# Altium PCB CC2530传感器.PcbDoc
Units mm, origin at the board's own origin, x right, y up, seen from the top; angles counter-clockwise.
Board outline 52.32 x 97.41 mm, 4 copper layers (Top Layer, Internal Plane 1, Internal Plane 2, Bottom Layer); 49 components, 46 nets, 169 pads, 35 vias.
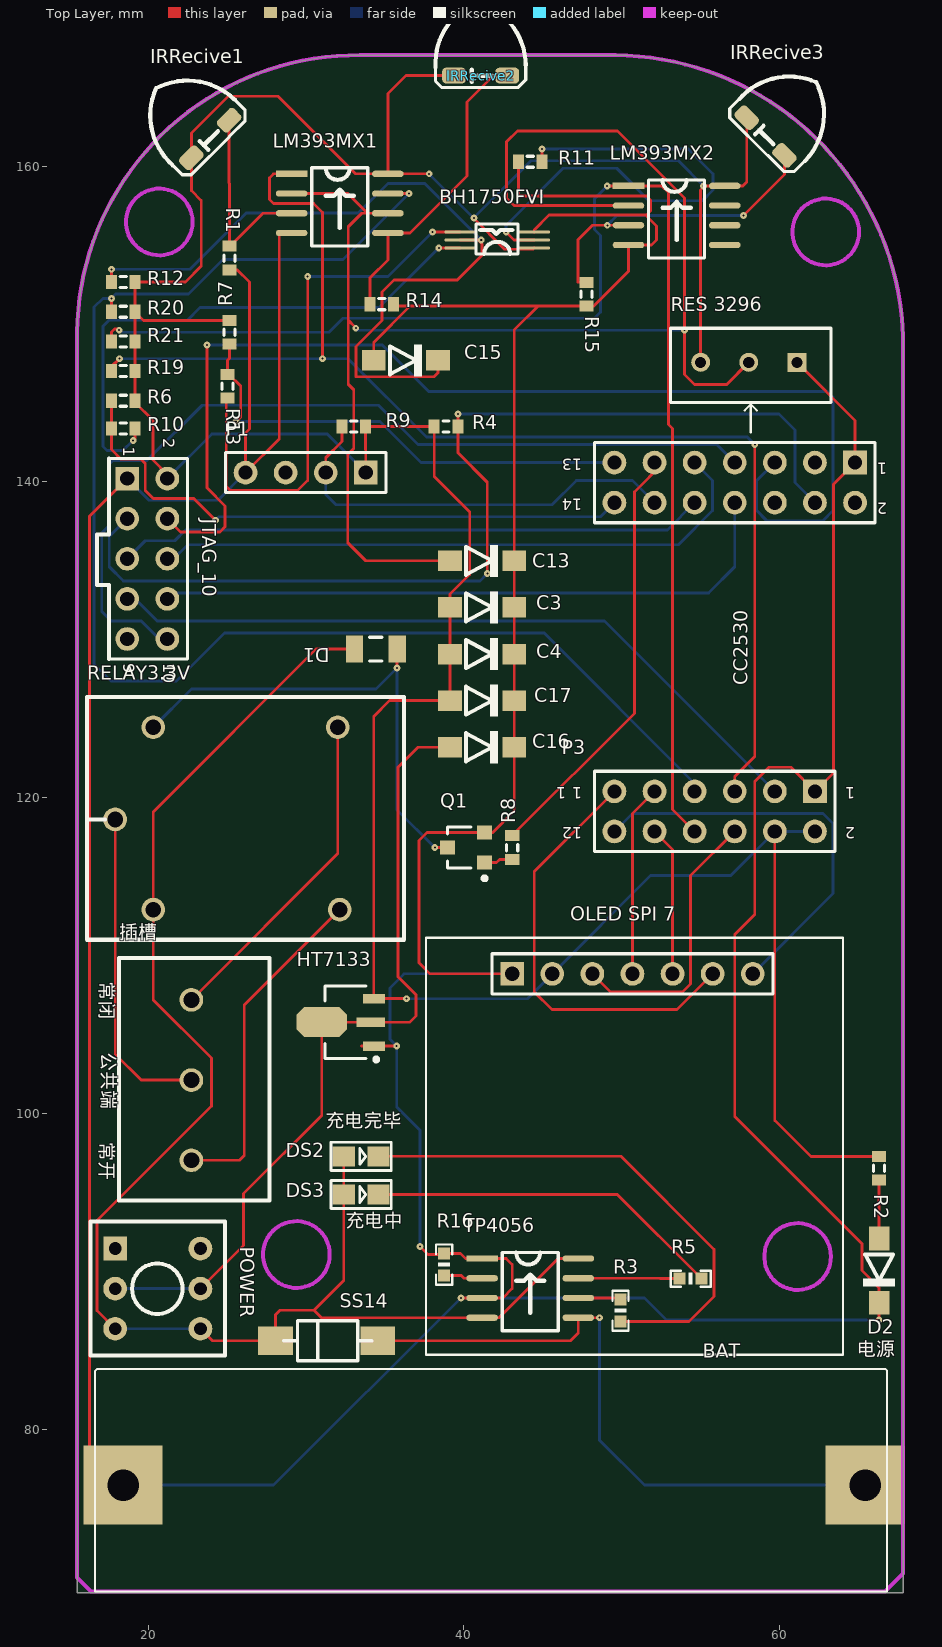
[diagram p0: Top Layer view]
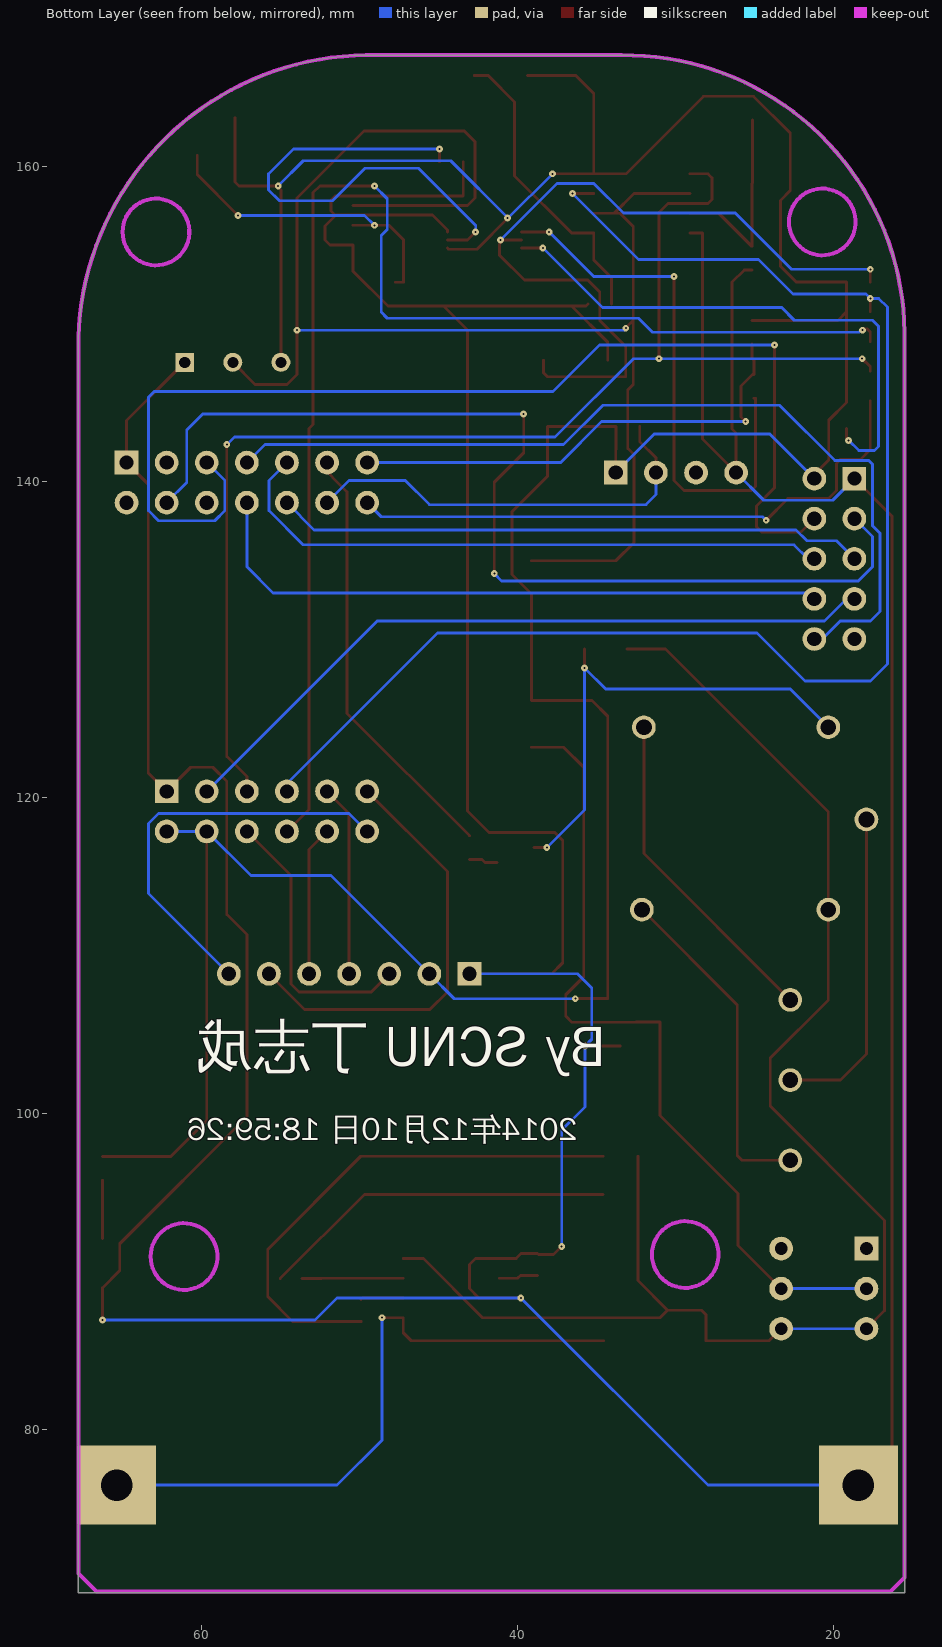
[diagram p1: Bottom Layer view, seen from below]
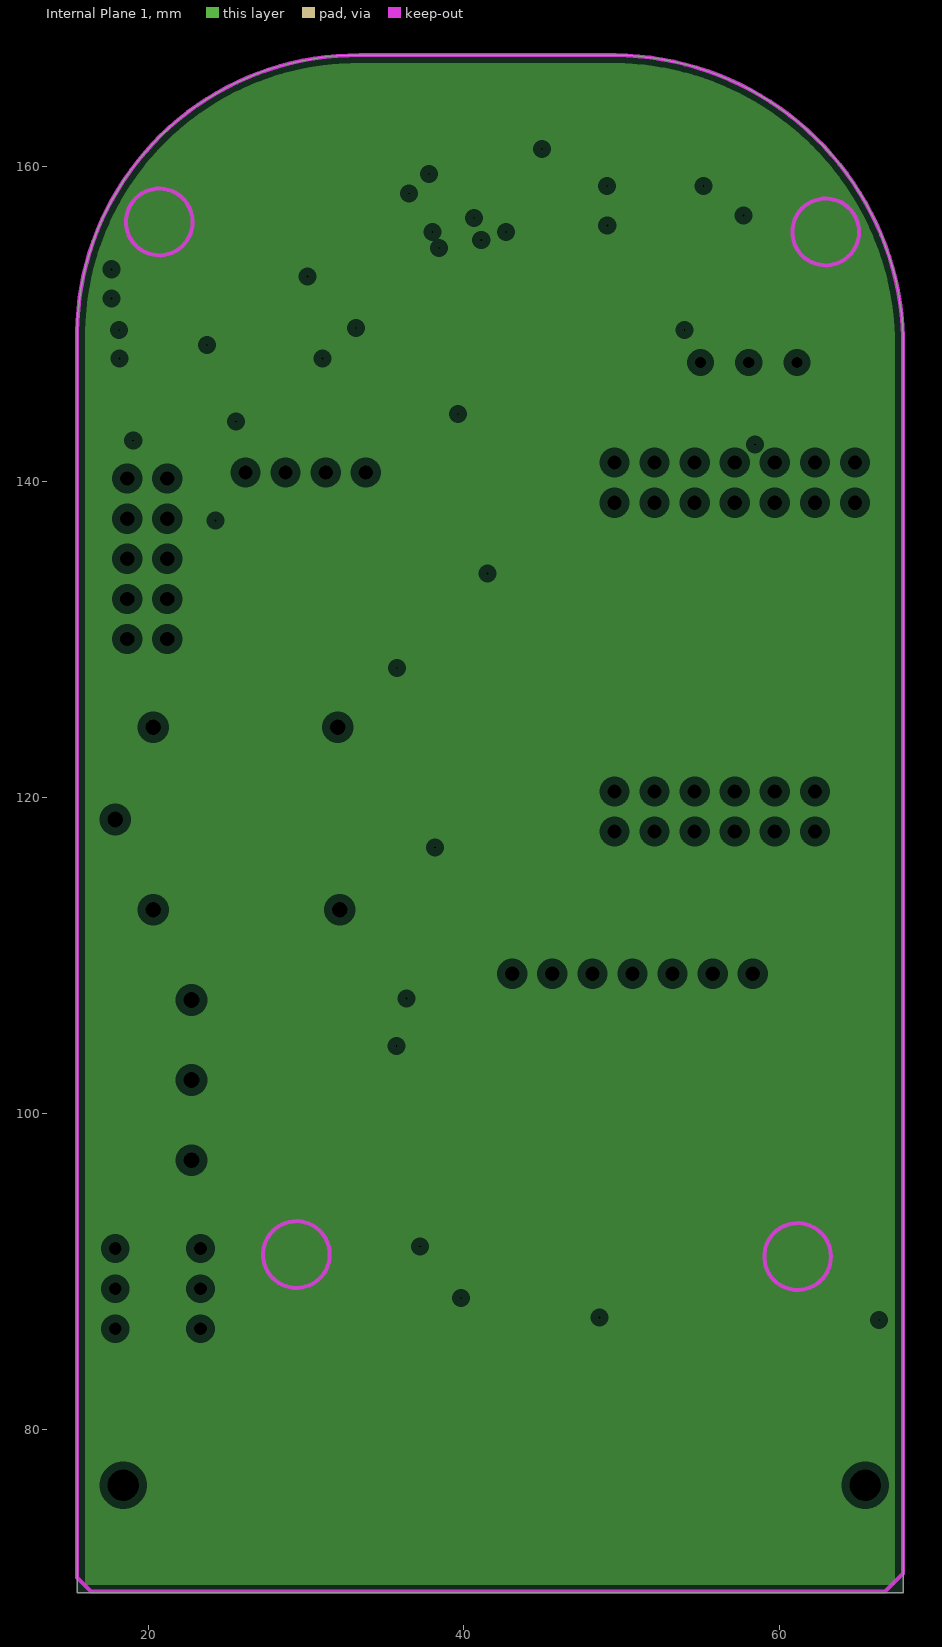
[diagram p2: Internal Plane 1, clearances drawn from the general rule]
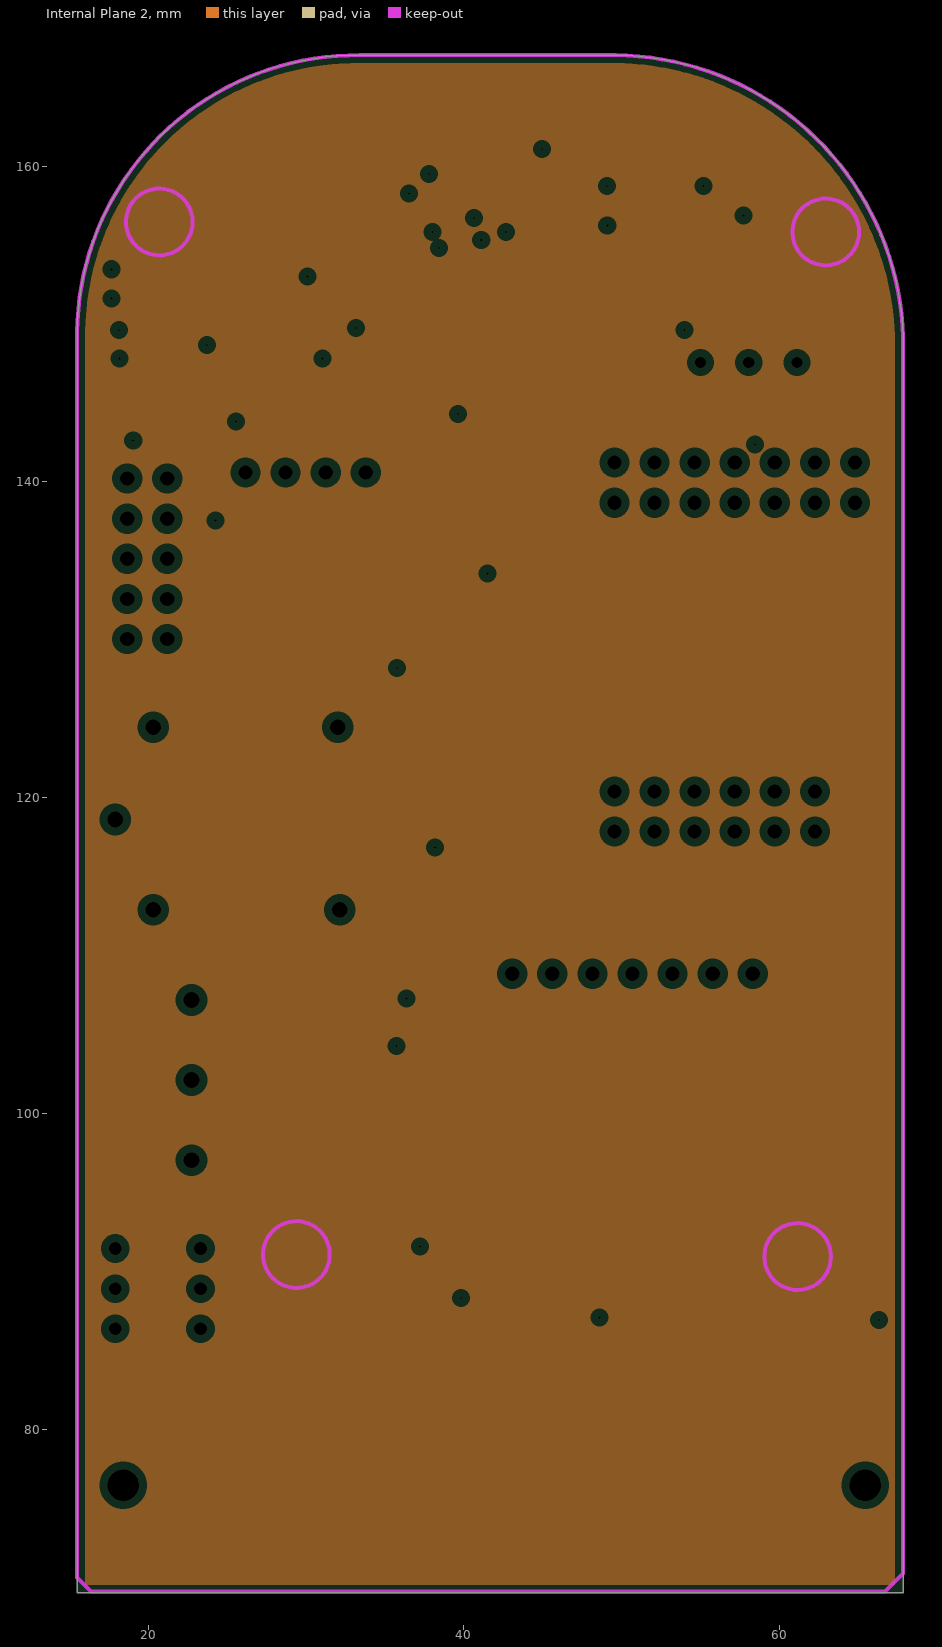
[diagram p3: Internal Plane 2, clearances drawn from the general rule]

## Layer stack, top to bottom
Top Layer: signal copper 0.0356
Dielectric: dielectric 0.32, FR-4, Dk 4.8
Internal Plane 1: plane copper 0.0356
Dielectric: dielectric 0.32, FR-4, Dk 4.8
Internal Plane 2: plane copper 0.0356
Dielectric: dielectric 0.32, FR-4, Dk 4.8
Bottom Layer: signal copper 0.0356

## Board outline
15.494,69.626 15.494,149.479 cw(c33.232,149.288) 33.422,167.026 48.853,167.026 cw(c49.401,148.609) 67.818,149.157 67.818,69.626

## Design rules (kind name [scope] priority, off if disabled: settings)
Clearance [All] p1: gap=0.3
PlaneClearance [All] p1: clearance=0.508
PlaneConnect [All] p1: planeconnectstyle=Relief reliefexpansion=0.508 reliefentries=4 reliefconductorwidth=0.254 reliefairgap=0.254
PolygonConnect [All] p1: connectstyle=Relief reliefconductorwidth=0.254 reliefentries=4 polygonreliefangle="90 Angle" airgapwidth=0.254
RoomDefinition CC2530传感器功能底板 [InComponentClass('CC2530传感器功能底板')] p1: confinementstyle=ConfineIn formatcopy=TRUE lockcomponents=FALSE outline 0,0 50.8,0 50.8,25.4 0,25.4
RoutingVias [All] p1: holewidth=0.127 width=0.432 viastyle="Through Hole" minholewidth=0.127 minwidth=0.432 maxholewidth=0.127 maxwidth=0.432
SolderMaskExpansion [All] p1: expansion=0.102
Width [All] p1: maxlimit=0.178 minlimit=0.178 preferedwidth=0.178
26 further rules are at their usual default settings.

## Components (designator, comment, footprint, x,y, rotation, side; value= is the part's Value field where it differs from the comment)
BAT "BAT" BAT 65.405,76.454 r180 top
BH1750FVI "BH1750FVI" BH1750FVI 44.704,154.813 r180 top
C3 "Cap" DIODE_SOP 41.148,132.048 r0 top
C4 "Cap Semi" DIODE_SOP 41.148,129.095 r0 top
C13 "Cap Semi" DIODE_SOP 41.148,135.001 r0 top
C15 "Cap Semi" DIODE_SOP 36.322,147.701 r0 top
C16 "Cap Pol1" DIODE_SOP 41.148,123.19 r0 top
C17 "Cap Pol1" DIODE_SOP 41.148,126.143 r0 top
CC2530 "Header 7X2" HDR2X7 64.77,141.224 r180 top (schematic designator P2)
D1 "1N4148" C1206 34.417,129.413 r180 top
D2 "LED" DIODE_SOP 66.294,90.043 r270 top
DS2 "LED1GREEN" SMDLED 32.385,97.282 r0 top
DS3 "LED1RED" SMDLED 32.385,94.869 r0 top
HT7133 "HT7133" HT7133 34.29,104.267 r180 top
IRRecive1 "IRRecive" IRRecive 22.733,160.528 r45 top
IRRecive2 "IRRecive" IRRecive 39.37,165.735 r0 top
IRRecive3 "IRRecive" IRRecive 57.912,163.068 r315 top
JTAG_10 "JTAG_10" JTAG_10 18.669,140.208 r270 top
LM393MX1 "LM393MX" LM393MX 29.083,159.512 r0 top
LM393MX2 "LM393MX" LM393MX 50.419,158.75 r0 top
"OLED SPI 7" "OLED SPI 7" "OLED SPI 7" 43.053,108.839 r0 top
P1 "Header 4" HDR1X4 33.782,140.589 r180 top
P3 "Header 6X2" HDR2X6 62.23,120.396 r180 top
POWER "BUTTON" BTN8.5*8.5 17.907,91.44 r0 top (schematic designator K?)
Q1 "8050" SOT-23R 40.259,116.84 r90 top
R1 "Res3" J1-0603 25.146,154.178 r90 top
R2 "330R" J1-0603 66.294,96.52 r90 top
R3 "1K" 0603P 49.911,87.503 r90 top
R4 "10K" J1-0603 38.862,143.51 r180 top
R5 "1K" 0603P 54.356,89.535 r180 top
R6 "Res3" J1-0603 18.415,145.136 r0 top
R7 "Res3" J1-0603 25.146,149.479 r90 top
R8 "1K" J1-0603 43.053,116.84 r270 top
R9 "Res Semi" J1-0603 33.02,143.51 r0 top
R10 "Res3" J1-0603 18.415,143.383 r180 top
R11 "Res3" J1-0603 44.196,160.274 r0 top
R12 "Res3" J1-0603 18.415,152.654 r0 top
R13 "Res3" J1-0603 25.019,146.05 r90 top
R14 "Res3" J1-0603 34.798,151.257 r180 top
R15 "Res3" J1-0603 47.752,151.892 r90 top
R16 "4K" 0603P 38.735,90.424 r90 top
R19 "Res3" J1-0603 18.415,147.015 r0 top
R20 "Res3" J1-0603 18.415,150.774 r0 top
R21 "Res3" J1-0603 18.415,148.895 r0 top
RELAY3.3V "RELAY3.3V" RELAY3.3V 17.907,118.618 r0 top
"RES 3296" "RES 3296" "RES 3296" 61.087,147.574 r180 top
SS14 "SS14" IN4007 34.544,85.598 r180 top
TP4056 "TP4056" TP4056 41.148,90.805 r0 top
插槽 "插槽" 杜邦线插槽 22.733,107.188 r0 top

## Footprints (in the part's own frame and the unit in brackets; to place one, negate y for a bottom-side part, rotate by r counter-clockwise, add the part's x,y. Pads: shape width x height; smd on the part's side, far side on the other; paste and mask are expansions set on the pad)
0603P [mil]
  rect 30x30 smd: 1(-27,0) 2(27.5,-0.06)
  silkscreen extent -50,-20 50,20
BAT [mm]
  rect 5x5 hole 2: 1(0,0) 2(46.99,0)
  silkscreen extent -1.4,-7.37 48.77,6.73
BH1750FVI [mm]
  oval 2x0.2 smd: 1(0.254,0) 2(0.254,-0.508) 3(0.254,-1.016) 4(4.953,-1.016) 5(4.953,-0.508) 6(4.953,0)
  silkscreen extent 1.27,-1.52 3.94,0.38
BTN8.5*8.5 [mm]
  rect 1.5x1.5 hole 0.8: 1(0,0)
  round 1.5 hole 0.8: 2(0,-2.54) 3(0,-5.08) 4(5.4,-5.08) 5(5.4,-2.54) 6(5.4,0)
  silkscreen extent -1.55,-6.79 6.95,1.71
C1206 [mm] "Chip Capacitor, Body 3.2x1.6mm, IPC High Density"
  rect 1.1x1.7 smd: 1(-1.35,0) 2(1.35,0)
  silkscreen extent -0.4,-0.75 0.4,0.75, body extent -1.7,-0.9 1.7,0.9, height 1.3
DIODE_SOP [mm]
  rect 1.5x1.3 smd: 1(-2.032,0) 2(2.032,0)
  silkscreen extent -1.02,-1.02 1.02,1.02
HDR1X4 [mm] "Connector; Header; 4 Position"
  rect 1.5x1.5 hole 0.9: 1(0,0)
  round 1.5 hole 0.9: 2(2.54,0) 3(5.08,0) 4(7.62,0)
  silkscreen extent -1.27,-1.27 8.89,1.27
HDR2X6 [mm] "Connector; Header; 6x2 Position"
  rect 1.5x1.5 hole 0.9: 1(0,0)
  round 1.5 hole 0.9: 2(0,2.54) 3(2.54,0) 4(2.54,2.54) 5(5.08,0) 6(5.08,2.54) 7(7.62,0) 8(7.62,2.54) 9(10.16,0) 10(10.16,2.54) 11(12.7,0) 12(12.7,2.54)
  silkscreen extent -1.27,-1.27 13.97,3.81
HDR2X7 [mm] "Connector; Header; 7x2 Position"
  rect 1.5x1.5 hole 0.9: 1(0,0)
  round 1.5 hole 0.9: 2(0,2.54) 3(2.54,0) 4(2.54,2.54) 5(5.08,0) 6(5.08,2.54) 7(7.62,0) 8(7.62,2.54) 9(10.16,0) 10(10.16,2.54) 11(12.7,0) 12(12.7,2.54) 13(15.24,0) 14(15.24,2.54)
  silkscreen extent -1.27,-1.27 16.51,3.81
HT7133 [mm]
  rect 1.4x0.6 smd: 1(0,0) 3(0,-3)
  rect 1.8x0.6 smd: 2(0.2,-1.5)
  oct 3.2x1.9 smd: 2(3.302,-1.524)
  silkscreen extent -0.28,-3.8 3.1,0.97, body extent 0.5,-3.8 3.1,0.8, height 1.6
IN4007 [mm]
  rect 2.2x1.8 smd: 1(0,0) 2(6.477,0)
  silkscreen extent 0.38,-1.27 5.97,1.27
IRRecive [mm]
  rrect50% 1.5x1 smd: 1(0,0) 2(3.373,0)
  silkscreen extent -1.18,-0.76 4.54,4.7
J1-0603 [mm] "Chip Resistor, Body 1.6x0.8mm, IPC High Density"
  rect 0.7x0.9 smd: 1(-0.75,0) 2(0.75,0)
  silkscreen extent -0.2,-0.35 0.2,0.35, body extent -0.85,-0.48 0.85,0.48, height 0.9
JTAG_10 [mm]
  rect 1.5x1.5 hole 0.9: 1(0,0)
  round 1.5 hole 0.9: 2(0,2.54) 3(2.54,0) 4(2.54,2.54) 5(5.08,0) 6(5.08,2.54) 7(7.62,0) 8(7.62,2.54) 9(10.16,0) 10(10.16,2.54)
  silkscreen extent -1.27,-1.9 11.43,3.81
LM393MX [mm]
  rect 2x0.4 smd: 1(0,0)
  oval 2x0.4 smd: 2(0,-1.249) 3(0,-2.498) 4(0,-3.746) 5(6.096,-3.746) 6(6.096,-2.498) 7(6.096,-1.249) 8(6.096,0)
  silkscreen extent 1.27,-4.57 4.83,0.38
"OLED SPI 7" [mm]
  rect 1.5x1.5 hole 0.9: 1(0,0)
  round 1.5 hole 0.9: 2(2.54,0) 3(5.08,0) 4(7.62,0) 5(10.16,0) 6(12.7,0) 7(15.24,0)
  silkscreen extent -5.46,-24.13 20.95,2.29
RELAY3.3V [mm]
  round 1.5 hole 1: 1(0,0) 2(14.097,5.842) 3(14.224,-5.715) 4(2.413,5.842) 5(2.413,-5.715)
  silkscreen extent -1.78,-7.62 18.29,7.75
"RES 3296" [mm]
  rect 1.2x1.2 hole 0.7: 1(0,0)
  round 1.2 hole 0.7: 2(3.048,0) 3(6.096,0)
  silkscreen extent -2.16,-2.16 8,4.44
SMDLED [mm]
  rect 1.4x1.27 smd: 1(0.001,-0.002) 2(2.211,-0.002)
  silkscreen extent -0.8,-0.89 3.01,0.89
SOT-23R [mm]
  rect 0.9x0.95 smd: 1(0.95,-1.048) 2(-0.95,-1.048) 3(0,1.302)
  silkscreen extent -2.07,-1.17 1.3,1.3
TP4056 [mm]
  rect 2x0.4 smd: 1(0,0)
  oval 2x0.4 smd: 2(0,-1.249) 3(0,-2.498) 4(0,-3.746) 5(6.096,-3.746) 6(6.096,-2.498) 7(6.096,-1.249) 8(6.096,0)
  silkscreen extent 1.27,-4.57 4.83,0.38
杜邦线插槽 [mm]
  round 1.5 hole 1: 1(0,0) 2(0,-5.08) 3(0,-10.16)
  silkscreen extent -4.57,-12.7 4.95,2.67

## Part data
C3: "Capacitor"
C4 C13 C15: "Capacitor (Semiconductor SIM Model)"
C16 C17: "Polarized Capacitor (Radial)"
CC2530: "Header, 7-Pin, Dual row"
D1: library part D
DS2 DS3: library part LED2, "Typical RED, GREEN, YELLOW, AMBER GaAs LED"
P1: "Header, 4-Pin"
P3: "Header, 6-Pin, Dual row"
Q1: library part NPN, "8050/BCW846/BCW847"
R1 R6 R7 R10 R11 R12 R13 R14 R15 R19 R20 R21: "Resistor"
R2: library part RES2
R3 R5 R8 R16: library part R
R4: library part res0402
R9: "Semiconductor Resistor"
SS14: library part IN4007

## Via types
v1: diameter 0.432, hole 0.127, Top Layer to Bottom Layer, 35 vias

## Nets (pads, with @x,y where several pads share a name; then routed paths per layer and width w, separated by ;. In a path a pad name is that pad's centre, name@x,y a point inside that pad or via, vN(x,y) a via of type N, cw(c..) or ccw(c..) an arc to the next point about the centre after c; other vN are vias at no path point)
AOUT1: IRRecive1.2 LM393MX1.3 R1.2 | length 12.8
  Top Layer w0.178: IRRecive1.2 25.118,158.93 25.146,158.902 R1.2 25.173,154.928 27.259,157.014 LM393MX1.3
AOUT2: IRRecive2.2 LM393MX1.5 R14.2 | length 19.4
  Top Layer w0.178: R14.2 34.048,152.933 35.179,154.064 LM393MX1.5 36.576,155.766 40.195,159.385 40.195,164.071 41.859,165.735 IRRecive2.2
AOUT3: IRRecive3.2 LM393MX2.3 R15.2 | length 20.6
  Top Layer w0.178: R15.2 47.231,152.642 47.231,155.333 48.15,156.252 v1(49.076,156.252) LM393MX2.3 ; v1(57.704,156.87) 60.297,159.464 IRRecive3.2
  Bottom Layer w0.178: v1(49.076,156.252) 49.694,156.87 v1(57.704,156.87)
BAT: BAT.1 SS14.1 TP4056.5 | length 41
  Top Layer w0.178: SS14.1 46.736,85.598 47.244,86.106 TP4056.5 v1(48.59,87.058)
  Bottom Layer w0.178: v1(48.59,87.058) 48.59,79.299 51.435,76.454 BAT.1
CSN: CC2530.10 JTAG_10.5 | length 37.4
  Bottom Layer w0.178: JTAG_10.5 19.812,136.271 21.676,136.271 22.366,136.961 52.887,136.961 CC2530.10
DC: CC2530.4 JTAG_10.3 R4.1 | length 65.8
  Top Layer w0.178: v1(39.624,144.297) 39.612,144.285 R4.1 39.612,141.846 41.478,139.979 v1(41.478,134.188)
  Bottom Layer w0.178: JTAG_10.3 17.53,136.529 17.53,134.62 18.423,133.727 41.017,133.727 v1(41.478,134.188) ; v1(39.624,144.297) 59.944,144.297 60.96,143.281 60.96,139.954 CC2530.4
DD: CC2530.5 JTAG_10.4 | length 73.2
  Top Layer w0.178: JTAG_10.4 22.047,136.83 24.536,136.83 24.867,137.16 24.867,138.481 23.724,139.624 v1(23.724,148.666)
  Bottom Layer w0.178: v1(23.724,148.666) 34.823,148.666 37.77,145.72 63.017,145.72 63.373,145.364 63.373,138.176 62.738,137.541 59.182,137.541 58.547,138.176 58.547,140.081 CC2530.5
GND: "OLED SPI 7.1" "RES 3296.1" BAT.2 BH1750FVI.3 C3.2 C4.2 C13.2 C15.1 C16.2 C17.2 CC2530.1 D2.2 HT7133.1 JTAG_10.1 LM393MX1.4 LM393MX2.4 P1.4 P3.1 Q1.1 R1.1 R11.1 R14.1 R15.1 R16.2 TP4056.1 TP4056.3 | length 368.6
  Top Layer w0.178: BAT.2 16.281,78.588 16.281,137.82 JTAG_10.1 ; R1.1 25.642,153.428 26.421,152.649 26.421,143.348 26.162,143.089 P1.4 28.296,142.723 28.296,155.766 LM393MX1.4 ; 33.503,104.267 HT7133.1 v1(35.738,104.267) ; C15.1 34.29,148.844 36.588,151.142 ; R14.1 35.663,151.142 36.588,151.142 ; v1(37.211,91.567) 37.719,91.059 38.673,91.059 R16.2 39.776,91.123 40.094,90.805 TP4056.1 42.672,90.805 43.053,90.424 43.053,88.9 42.46,88.307 TP4056.3 39.81,88.307 v1(39.802,88.316) ; 43.053,108.839 37.846,108.839 37.145,109.54 37.145,117.282 37.653,117.79 Q1.1 41.819,117.79 43.18,119.151 C16.2 C17.2 C4.2 C3.2 C13.2 43.18,149.618 44.704,151.142 ; R11.1 43.446,158.14 43.471,158.115 51.562,158.115 51.816,157.861 51.816,157.15 51.562,156.896 ; BH1750FVI.3 44.45,155.956 45.39,156.896 51.562,156.896 ; 61.087,147.574 64.77,143.891 CC2530.1 63.398,139.852 63.398,121.564 P3.1 60.706,121.92 59.309,121.92 58.42,121.031 58.42,112.598 57.15,111.328 57.15,99.797 65.202,91.745 65.202,90.043 66.294,88.951 D2.2 v1(66.294,86.919) ; 36.588,151.142 44.704,151.142 ; 44.704,151.142 R15.1 48.221,151.142 50.419,153.34 LM393MX2.4 51.88,155.004 52.197,155.321 52.197,156.21 51.562,156.845 51.562,156.896
  Bottom Layer w0.178: BAT.2 27.94,76.454 v1(39.802,88.316) 51.435,88.316 52.832,86.919 v1(66.294,86.919) ; JTAG_10.1 20.041,138.836 24.409,138.836 P1.4 ; v1(37.211,91.567) 37.211,98.933 35.738,100.406 v1(35.738,104.267) 35.306,104.699 35.306,107.95 36.195,108.839 43.053,108.839
MISO: CC2530.7 JTAG_10.10 | length 57.3
  Bottom Layer w0.178: JTAG_10.10 20.955,129.794 19.562,131.187 17.657,131.187 17.052,131.792 17.052,136.745 17.526,137.219 17.526,141.115 17.758,141.347 19.91,141.347 23.419,144.856 34.595,144.856 37.088,142.363 56.007,142.363 56.007,142.367 CC2530.7
MOSI: CC2530.8 JTAG_10.8 | length 40.8
  Bottom Layer w0.178: JTAG_10.8 21.59,132.969 55.499,132.969 57.15,134.62 CC2530.8
NetBH1750FVI_2: BH1750FVI.2 R11.2 | length 31.5
  Top Layer w0.178: v1(42.672,155.829) 43.18,155.321 BH1750FVI.2 ; R11.2 v1(44.946,161.087)
  Bottom Layer w0.178: v1@42.653,155.848 42.653,156.242 46.274,159.863 49.678,159.863 51.731,157.81 55.093,157.81 55.778,158.496 55.778,159.512 54.204,161.087 v1(44.946,161.087)
NetBH1750FVI_4: BH1750FVI.4 R13.1 | length 34.9
  Top Layer w0.178: R13.1 24.943,145.3 24.943,139.7 25.197,139.446 29.464,139.446 30.099,140.081 v1(30.099,153.01) ; v1(37.998,155.829) BH1750FVI.4
  Bottom Layer w0.178: v1(30.099,153.01) 35.179,153.01 v1(37.998,155.829)
NetBH1750FVI_5: BH1750FVI.5 C15.2 R12.1 | length 49.8
  Top Layer w0.178: R12.1 v1(17.665,153.467) ; C15.2 38.354,146.914 38.1,146.66 33.151,146.66 33.151,148.569 34.798,150.216 34.798,152.019 35.56,152.781 39.573,152.781 41.148,154.356 41.148,155.067 v1@40.894,155.321 ; BH1750FVI.5 v1@40.894,155.321 ; v1(41.094,155.321) v1@40.894,155.321
  Bottom Layer w0.178: v1(17.665,153.467) 22.657,153.467 26.213,157.023 33.299,157.023 35.179,158.902 37.513,158.902 v1(41.094,155.321)
NetBH1750FVI_6: BH1750FVI.6 R10.1 | length 35.4
  Top Layer w0.178: v1(19.05,142.621) 19.025,142.621 19.165,142.761 R10.1 ; v1(38.405,154.813) BH1750FVI.6
  Bottom Layer w0.178: v1(19.05,142.621) 19.025,142.621 18.39,141.986 17.399,141.986 17.145,142.24 17.145,149.86 17.526,150.241 22.479,150.241 23.274,151.036 34.628,151.036 v1(38.405,154.813)
NetC16_1: C16.1 HT7133.2 POWER.2 POWER.5 | length 51.7
  Top Layer w0.178: POWER.5 26.035,91.628 26.035,94.92 30.988,99.873 30.988,105.791 32.512,105.791 32.536,105.767 34.09,105.767 36.552,105.767 36.955,106.17 36.955,107.515 35.814,108.656 35.814,121.92 37.084,123.19 C16.1
  Bottom Layer w0.178: POWER.2 POWER.5
NetD1_1: D1.1 Q1.3 RELAY3.3V.4 | length 31.4
  Top Layer w0.178: v1(35.767,128.219) D1.1 ; v1(38.151,116.84) Q1.3
  Bottom Layer w0.178: RELAY3.3V.4 22.733,126.873 34.421,126.873 v1(35.767,128.219) 35.767,119.224 v1(38.151,116.84)
NetD2_A: D2.1 R2.1 | length 3.7
  Top Layer w0.178: D2.1 R2.1
NetDS2_2: DS2.2 R3.1 | length 33.2
  Top Layer w0.178: DS2.2 49.938,97.28 55.829,91.389 55.829,88.392 54.254,86.817 R3.1
NetDS3_2: DS3.2 R5.1 | length 22.7
  Top Layer w0.178: DS3.2 49.709,94.867 R5.1
NetQ1_2: Q1.2 R8.2 | length 1.8
  Top Layer w0.178: Q1.2 42.062,115.89 42.262,116.09 R8.2
NetR3_2: R3.2 TP4056.6 | length 2.7
  Top Layer w0.178: TP4056.6 49.807,88.307 R3.2
NetR5_2: R5.2 TP4056.7 | length 6.4
  Top Layer w0.178: TP4056.7 52.409,89.556 52.429,89.537 R5.2
NetR16_1: R16.1 TP4056.2 | length 2.5
  Top Layer w0.178: R16.1 39.827,89.738 40.009,89.556 TP4056.2
NetRELAY3.3V_1: RELAY3.3V.1 插槽.2 | length 20.4
  Top Layer w0.178: RELAY3.3V.1 17.907,103.759 19.558,102.108 插槽.2
P00: LM393MX1.1 P3.5 R19.1 | length 81.8
  Top Layer w0.178: R19.1 17.665,147.32 17.69,147.32 v1(18.173,147.803) ; LM393MX1.1 27.94,159.512 27.686,159.258 27.686,157.886 27.94,157.632 30.48,157.632 31.039,157.074 v1(31.039,147.803) ; P3.5 57.15,121.328 58.42,122.598 v1(58.42,142.367)
  Bottom Layer w0.178: v1(18.173,147.803) v1(31.039,147.803) 32.664,147.803 37.626,142.841 55.805,142.841 55.809,142.845 57.942,142.845 v1(58.42,142.367)
P01: "OLED SPI 7.3" P3.6 | length 17.7
  Top Layer w0.178: 48.133,108.839 49.276,107.696 53.848,107.696 54.356,108.204 54.356,115.062 P3.6
P02: LM393MX1.7 P3.7 R20.1 | length 91.9
  Top Layer w0.178: R20.1 v1(17.665,151.625) ; LM393MX1.7 36.521,158.263 v1(36.525,158.267)
  Bottom Layer w0.178: v1(36.525,158.267) 32.334,154.076 24.74,154.076 22.555,151.892 17.932,151.892 v1(17.665,151.625) 17.132,151.625 16.574,151.067 16.574,128.46 17.653,127.381 21.793,127.381 24.841,130.429 45.085,130.429 54.61,120.904 P3.7
P03: LM393MX2.1 P3.8 R21.1 | length 86.1
  Top Layer w0.178: R21.1 17.665,149.491 17.856,149.682 18.173,149.682 18.161,149.67 v1(18.161,149.606) ; v1(49.073,158.75) LM393MX2.1 52.527,158.75 52.959,158.318 52.959,143.637 53.209,143.387 53.209,119.257 P3.8
  Bottom Layer w0.178: v1(18.161,149.606) 18.161,149.67 18.173,149.682 18.376,149.479 31.453,149.479 32.342,150.368 48.26,150.368 48.641,150.749 48.641,155.6 48.26,155.981 48.26,157.937 v1(49.073,158.75)
P04: "OLED SPI 7.4" P3.9 | length 12.1
  Top Layer w0.178: 50.673,108.839 50.673,118.999 P3.9
P05: "OLED SPI 7.5" P3.10 | length 9.5
  Top Layer w0.178: P3.10 53.213,116.713 53.213,108.839
P06: "OLED SPI 7.6" P3.11 | length 27.5
  Top Layer w0.178: P3.11 44.45,115.316 44.45,107.696 45.568,106.578 53.492,106.578 55.753,108.839
P07: "OLED SPI 7.7" P3.12 | length 26.2
  Bottom Layer w0.178: P3.12 50.673,118.999 62.738,118.999 63.373,118.364 63.373,113.919 58.293,108.839
P10: CC2530.14 R6.1 R10.2 | length 38.3
  Top Layer w0.178: R6.1 R10.2 17.665,142.05 18.288,141.427 19.558,141.427 19.812,141.173 19.812,139.446 20.32,138.938 22.885,138.938 v1(24.257,137.566)
  Bottom Layer w0.178: v1(24.257,137.566) 24.486,137.795 48.641,137.795 CC2530.14
P11: CC2530.13 R7.1 R13.2 | length 30.6
  Top Layer w0.178: R7.1 25.146,147.828 25.019,147.701 R13.2 25.121,146.8 25.858,146.063 25.858,144.12 v1(25.552,143.815)
  Bottom Layer w0.178: v1(25.552,143.815) 34.681,143.815 37.272,141.224 CC2530.13
P12: CC2530.12 P1.2 R9.1 | length 27
  Top Layer w0.178: P1.2 31.242,141.529 32.27,142.557 R9.1
  Bottom Layer w0.178: P1.2 31.242,139.192 31.877,138.557 45.593,138.557 47.117,140.081 50.673,140.081 CC2530.12
P13: CC2530.11 R8.1 | length 28.2
  Top Layer w0.178: R8.1 50.8,125.337 50.8,139.37 52.654,141.224 CC2530.11
P15: CC2530.9 JTAG_10.6 | length 39.3
  Bottom Layer w0.178: JTAG_10.6 21.608,135.128 22.488,136.008 22.479,136.017 53.59,136.017 55.749,138.176 55.749,140.085 CC2530.9
P20: CC2530.6
P23: CC2530.3
P24: CC2530.2
RESET_N: JTAG_10.7 P3.3 | length 46.1
  Bottom Layer w0.178: JTAG_10.7 19.177,132.588 20.574,131.191 48.895,131.191 P3.3
VCC3.3: "OLED SPI 7.2" "RES 3296.3" BH1750FVI.1 C3.1 C4.1 C17.1 HT7133.3 IRRecive1.1 IRRecive2.1 IRRecive3.1 JTAG_10.2 LM393MX1.8 LM393MX2.8 P1.1 P3.2 P3.4 R2.2 R4.2 R6.2 R7.2 R9.2 R12.2 R19.2 R20.2 R21.2 | length 226.3
  Top Layer w0.178: JTAG_10.2 21.209,140.462 20.295,141.376 20.295,143.904 19.165,145.034 R6.2 R19.2 R21.2 R20.2 ; R7.2 19.71,150.229 R20.2 ; P1.1 33.782,142.037 33.77,142.049 R9.2 R4.2 38.112,140.36 40.361,138.112 40.361,134.137 39.116,132.893 C3.1 C4.1 C17.1 35.281,126.143 34.29,125.152 HT7133.3 36.347,107.267 v1(36.35,107.264) ; v1(37.795,159.512) LM393MX1.8 ; IRRecive2.1 36.322,165.735 35.179,164.592 LM393MX1.8 ; v1@40.602,156.705 42.572,154.735 44.372,154.735 BH1750FVI.1 ; 54.991,147.574 54.991,158.496 v1@55.245,158.75 ; v1(55.169,158.75) v1@55.245,158.75 ; IRRecive3.1 57.912,159.004 57.658,158.75 LM393MX2.8 v1@55.245,158.75 ; P3.4 59.69,99.556 61.976,97.27 R2.2 ; R20.2 R12.2 22.352,152.654 23.353,153.655 23.353,157.825 22.733,158.445 IRRecive1.1 22.733,162.091 25.063,164.421 28.238,164.421 33.147,159.512 LM393MX1.8
  Bottom Layer w0.178: JTAG_10.2 24.028,143.027 31.344,143.027 P1.1 ; v1(36.35,107.264) 44.018,107.264 45.593,108.839 51.816,115.062 56.896,115.062 P3.4 P3.2 ; v1(37.795,159.512) 40.602,156.705 44.238,160.341 53.578,160.341 v1(55.169,158.75)
  other v1: 40.64,156.718
VCC3.7: D1.2 DS2.1 DS3.1 POWER.3 POWER.4 RELAY3.3V.5 SS14.2 TP4056.4 TP4056.8 | length 98.5
  Top Layer w0.178: POWER.3 16.764,87.503 16.764,93.218 24.003,100.457 24.003,103.505 20.32,107.188 RELAY3.3V.5 20.32,119.101 30.632,129.413 D1.2 ; POWER.4 24.069,85.598 SS14.2 28.067,87.249 28.346,87.528 30.506,87.528 ; DS2.1 DS3.1 32.386,89.408 30.506,87.528 ; TP4056.8 45.974,90.805 42.227,87.058 TP4056.4 30.976,87.058 30.506,87.528
  Bottom Layer w0.178: POWER.3 POWER.4
VREF: "RES 3296.2" C13.1 LM393MX1.2 LM393MX1.6 LM393MX2.2 | length 98.3
  Top Layer w0.178: LM393MX1.2 32.635,158.263 33.884,157.014 ; 32.673,150.241 33.096,149.818 33.096,149.784 v1(33.147,149.733) ; LM393MX1.6 33.884,157.014 ; C13.1 33.782,135.001 32.639,136.144 32.639,141.732 33.02,142.113 33.02,145.837 32.673,146.184 32.673,156.159 33.528,157.014 33.884,157.014 ; LM393MX2.2 43.18,157.501 42.697,157.984 42.697,161.544 43.383,162.23 49.733,162.23 53.975,157.988 v1(53.975,149.606) 53.975,146.812 54.61,146.177 56.642,146.177 58.039,147.574
  Bottom Layer w0.178: v1(33.147,149.733) 33.274,149.606 v1(53.975,149.606) ; 57.658,147.574 58.039,147.574
常开: RELAY3.3V.3 插槽.3 | length 21.6
  Top Layer w0.178: 插槽.3 25.781,97.028 26.086,97.333 26.086,106.858 RELAY3.3V.3
常闭: RELAY3.3V.2 插槽.1 | length 21.1
  Top Layer w0.178: 插槽.1 32.004,116.459 RELAY3.3V.2
pads on no net: JTAG_10.9 LM393MX2.5 LM393MX2.6 LM393MX2.7 P1.3 POWER.1 POWER.6

## Polygon pours and split planes (outlines as drawn)
no net on Internal Plane 1 (split plane): 49.987,166.516 50.573,166.488 51.157,166.44 51.74,166.373 52.32,166.287 52.896,166.182 53.469,166.058 54.038,165.916 54.602,165.755 55.16,165.575 55.712,165.378 56.258,165.162 56.795,164.929 57.325,164.678 57.847,164.41 58.359,164.126 58.862,163.824 59.355,163.506 59.837,163.173 60.308,162.824 60.767,162.459 61.214,162.08 61.649,161.686 62.07,161.278 62.478,160.857 62.872,160.422 63.251,159.975 63.616,159.516 63.965,159.045 64.298,158.563 64.616,158.07 64.918,157.567 65.202,157.055 65.47,156.533 65.721,156.003 65.954,155.466 66.17,154.92 66.367,154.368 66.547,153.81 66.707,153.246 66.85,152.677 66.974,152.104 67.079,151.528 67.165,150.948 67.232,150.365 67.28,149.781 67.308,149.195 67.309,149.17 67.308,149.157 67.308,70.136 16.004,70.136 16.004,149.479 16.004,149.481 16.011,149.877 16.041,150.464 16.091,151.051 16.161,151.635 16.252,152.216 16.361,152.794 16.491,153.368 16.64,153.937 16.808,154.501 16.996,155.059 17.202,155.61 17.427,156.153 17.671,156.689 17.933,157.216 18.212,157.733 18.509,158.241 18.824,158.739 19.155,159.225 19.502,159.7 19.866,160.162 20.245,160.612 20.639,161.049 21.048,161.472 21.471,161.881 21.908,162.275 22.358,162.654 22.82,163.018 23.295,163.365 23.781,163.696 24.279,164.011 24.787,164.308 25.304,164.587 25.831,164.849 26.367,165.093 26.91,165.318 27.461,165.524 28.019,165.712 28.583,165.88 29.152,166.029 29.726,166.159 30.304,166.268 30.885,166.359 31.469,166.429 32.056,166.479 32.643,166.509 33.232,166.519 33.407,166.516 33.409,166.516 33.412,166.516 33.416,166.516 33.422,166.516 48.853,166.516 48.861,166.516 48.869,166.516 48.882,166.518 49.401,166.526
no net on Internal Plane 2 (split plane): 49.987,166.516 50.573,166.488 51.157,166.44 51.74,166.373 52.32,166.287 52.896,166.182 53.469,166.058 54.038,165.916 54.602,165.755 55.16,165.575 55.712,165.378 56.258,165.162 56.795,164.929 57.325,164.678 57.847,164.41 58.359,164.126 58.862,163.824 59.355,163.506 59.837,163.173 60.308,162.824 60.767,162.459 61.214,162.08 61.649,161.686 62.07,161.278 62.478,160.857 62.872,160.422 63.251,159.975 63.616,159.516 63.965,159.045 64.298,158.563 64.616,158.07 64.918,157.567 65.202,157.055 65.47,156.533 65.721,156.003 65.954,155.466 66.17,154.92 66.367,154.368 66.547,153.81 66.707,153.246 66.85,152.677 66.974,152.104 67.079,151.528 67.165,150.948 67.232,150.365 67.28,149.781 67.308,149.195 67.309,149.17 67.308,149.157 67.308,70.136 16.004,70.136 16.004,149.479 16.004,149.481 16.011,149.877 16.041,150.464 16.091,151.051 16.161,151.635 16.252,152.216 16.361,152.794 16.491,153.368 16.64,153.937 16.808,154.501 16.996,155.059 17.202,155.61 17.427,156.153 17.671,156.689 17.933,157.216 18.212,157.733 18.509,158.241 18.824,158.739 19.155,159.225 19.502,159.7 19.866,160.162 20.245,160.612 20.639,161.049 21.048,161.472 21.471,161.881 21.908,162.275 22.358,162.654 22.82,163.018 23.295,163.365 23.781,163.696 24.279,164.011 24.787,164.308 25.304,164.587 25.831,164.849 26.367,165.093 26.91,165.318 27.461,165.524 28.019,165.712 28.583,165.88 29.152,166.029 29.726,166.159 30.304,166.268 30.885,166.359 31.469,166.429 32.056,166.479 32.643,166.509 33.232,166.519 33.407,166.516 33.409,166.516 33.412,166.516 33.416,166.516 33.422,166.516 48.853,166.516 48.861,166.516 48.869,166.516 48.882,166.518 49.401,166.526

## Keep-outs
Keep-Out Layer:
  circle w0.254: c29.382,91.059 r2.114
  circle w0.254: c61.132,90.932 r2.114
  circle w0.254: c62.91,155.829 r2.114
  circle w0.254: c20.701,156.464 r2.114
  lines w0.254: 15.494,70.612 16.383,69.723 66.675,69.723 67.818,70.866 67.818,149.157 ccw(c49.401,148.609) 48.853,167.026 33.422,167.026 ccw(c33.232,149.288) 15.494,149.479 15.494,70.612

## Silkscreen, mask and mechanical layers (free items; w line width, h text height)
Top Overlay:
  text "常闭" at 16.637,108.331 h1.52 r270
  text "公共端" at 16.764,103.886 h1.52 r270
  text "充电完毕" at 31.242,98.806 h1.52
  text "常开" at 16.637,98.171 h1.52 r270
  text "充电中" at 32.512,92.456 h1.52
  text "电源" at 64.897,84.328 h1.52
Bottom Overlay:
  text "By SCNU 丁志成" at 34.417,102.108 h4.52
  text "2014年12月10日 18:59:26" at 36.195,97.79 h2.52

## Dimensions
15.494,69.626 to 67.818,69.626 on Mechanical 1

## Text inside footprints (layer, text, board x,y; h text height)
CC2530: Top Overlay "2" at 66.802,138.938 h1.27 r180; Top Overlay "1" at 66.802,141.478 h1.27 r180; Top Overlay "14" at 47.498,139.192 h1.27 r180; Top Overlay "13" at 47.498,141.732 h1.27 r180
JTAG_10: Top Overlay "10" at 20.701,128.524 h1.27 r270; Top Overlay "9" at 18.161,128.524 h1.27 r270; Top Overlay "1" at 18.161,142.24 h1.27 r270; Top Overlay "2" at 20.701,142.748 h1.27 r270
P3: Top Overlay "12" at 47.498,118.364 h1.27 r180; Top Overlay "1" at 46.482,120.904 h1.27 r180; Top Overlay "1" at 47.498,120.904 h1.27 r180; Top Overlay "1" at 64.77,120.904 h1.27 r180; Top Overlay "2" at 64.77,118.364 h1.27 r180